# EAGLE board Analog Switch (EAGLE 6.6.0)

No outline drawn. Coordinates in mm, seen from the top.
Copper layers (1*16): Top 0.035mm / dielectric 1.5mm / Bottom 0.035mm
Design rules "default": minimum track width 10mil, minimum drill 24mil, track to track 8mil, track to pad 8mil, pad to pad 8mil, via to via 8mil, smd to smd 8mil, copper to edge 40mil, drill to drill 8mil, minimum pad ring 10mil, minimum via ring 8mil, stop-mask expansion 4mil, vias tented up to drill 0mil, thermal gap 10mil

## Placement (x,y rotation side)
E$1  [4U_1]  0,0 0 top
E$7  [3.5MM_JACK_TAYDA]  12.7,128.27 270 top
E$22  [3.5MM_JACK_TAYDA]  12.7,158.75 270 top
E$24  [3.5MM_JACK_TAYDA]  12.7,143.51 270 top
E$29  [3.5MM_JACK_TAYDA]  12.7,104.14 270 top
E$30  [3.5MM_JACK_TAYDA]  12.7,73.66 270 top
E$31  [3.5MM_JACK_TAYDA]  12.7,88.9 270 top
E$32  [3.5MM_JACK_TAYDA]  12.7,34.29 270 top
E$33  [3.5MM_JACK_TAYDA]  12.7,49.53 270 top
E$34  [3.5MM_JACK_TAYDA]  12.7,19.05 270 top
E$37  [LED_3MM]  3.81,49.53 180 top
E$40  [LED_3MM]  3.81,104.14 180 top
E$41  [LED_3MM]  3.81,158.75 180 top

## Library data of the parts
E$1 E$7 E$22 E$24 E$29-E$34 E$37 E$40 E$41 = !synth_panel

## Text on the board
PanelText: Gate | Audio In | Audio Out | Gate | Audio In | Audio Out | Gate | Audio In | Audio Out | Tri-Analog-Switch